# EAGLE board happy plant (EAGLE 9.7.0)

Size 199.61 x 152.56 mm. Coordinates in mm from the lower left corner, seen from the top.
Outline: 0,0 199.61,0 199.61,152.56 0,152.56 0,0
Copper layers (1*16): Top 0.035mm / dielectric 1.5mm / Bottom 0.035mm
Design rules "default": minimum track width 6mil, minimum drill 0.35mm, track to track 6mil, track to pad 6mil, pad to pad 6mil, via to via 6mil, smd to smd 6mil, copper to edge 40mil, drill to drill 6mil, minimum pad ring 10mil, minimum via ring 8mil, stop-mask expansion 4mil, vias tented up to drill 0mil, thermal gap 10mil

## Footprints (pad centres in the part's own frame; a part is rotated, then mirrored left to right if it is on the bottom)
BATTERY-GENERIC = drill 1.118 pad 3.15 octagon: + 2.54,0; - -2.54,0
LEDRD254W60D565H860B_W = drill 0.981 pad 1.581: 1 -1.27,0; 2 1.27,0
RESAD1016W63L850D250B = drill 0.83 pad 1.43: 1 -5.08,0; 2 5.08,0
HA-06-SM065 = drill 1 pad 1.676: 1 -2.54,-2.54; 2 0,2.54; 3 2.54,-2.54
SG90 = drill 1.016 long: 1 -2.54,0; 2 0,0; 3 2.54,0
TO220BV = drill 1.016 long: D 0,-2.54; G -2.54,-2.54; S 2.54,-2.54
ARDUINO-UNO-R3-SHIELD = drill 1.016 pad 1.88: 3.3V 24.13,-2.54; 5V 24.13,0; A0 24.13,12.7; A1 24.13,15.24; A2 24.13,17.78; A3 24.13,20.32; A4 24.13,22.86; A5 24.13,25.4; AREF -24.13,-13.97; D2 -24.13,20.32; D3 -24.13,17.78; D4 -24.13,15.24; D5 -24.13,12.7; D6 -24.13,10.16; D7 -24.13,7.62; D8 -24.13,3.81; D9 -24.13,1.27; D10 -24.13,-1.27; D11 -24.13,-3.81; D12 -24.13,-6.35; D13 -24.13,-8.89; GND@0 24.13,2.54; GND@1 24.13,5.08; GND@2 -24.13,-11.43; IOREF 24.13,-7.62; NC 24.13,-10.16; RES 24.13,-5.08; RX -24.13,25.4; SCL -24.13,-19.05; SDA -24.13,-16.51; TX -24.13,22.86; VIN 24.13,7.62
7SEG-X4-I2C = drill 1.016 long: P$1 -3.81,0; P$2 -1.27,0; P$3 1.27,0; P$4 3.81,0

## Placement (x,y rotation side)
BAT1  9V  [BATTERY-GENERIC]  190.08,133.04 90 top
BAT2  9V  [BATTERY-GENERIC]  191.36,90.53 90 top
D4  WHITE  [LEDRD254W60D565H860B_W]  57.57,134.15 270 top
D5  WHITE  [LEDRD254W60D565H860B_W]  67.73,134.15 270 top
D6  WHITE  [LEDRD254W60D565H860B_W]  77.89,134.15 270 top
R1  4k  [RESAD1016W63L850D250B]  44.87,140.5 90 top
R2  1k  [RESAD1016W63L850D250B]  77.89,127.8 90 top
R3  1k  [RESAD1016W63L850D250B]  67.73,127.8 90 top
R4  1k  [RESAD1016W63L850D250B]  57.57,127.8 90 top
RPOTNUM3  250k  [HA-06-SM065]  153.95,15.66 0 top
RPOTNUM13  250k  [HA-06-SM065]  184.57,15.22 0 top
RPOTNUM24  250k  [HA-06-SM065]  169.34,15.2 0 top
RPOTNUM44  10k  [HA-06-SM065]  138.76,15.99 0 top
SERVO1  SERVOSG90  [SG90]  44.87,145.58 180 top
T3  NMOSFET  [TO220BV]  77.89,112.56 0 top
T4  NMOSFET  [TO220BV]  67.73,112.56 0 top
T5  NMOSFET  [TO220BV]  57.57,112.56 0 top
U1  ARDUINO-UNO-R3-SHIELD  [ARDUINO-UNO-R3-SHIELD]  47.88,29.84 270 top
U2  RED  [7SEG-X4-I2C]  120.6,62.25 0 top

## Library data of the parts
BAT1 BAT2 R1-R4 RPOTNUM3 RPOTNUM13 RPOTNUM24 RPOTNUM44 SERVO1 U1 U2 = Tinkercad
D4-D6 = Tinkercad; CATEGORY: Opto-Electronic; SUB-CATEGORY: LED; VALUE: LED_WHITE
T3-T5 = Tinkercad; CATEGORY: Transistor; SUB-CATEGORY: MOSFET; TYPE: N-Channel

## Nets
BAT1+: BAT1.+ D4.1 D5.1 D6.1 R1.1
BAT1-: BAT1.- BAT2.+
BAT2-: BAT2.- RPOTNUM3.1 RPOTNUM13.1 RPOTNUM24.1 RPOTNUM44.1 SERVO1.1 T3.S T4.S T5.S U1.GND@0 U1.GND@1 U1.GND@2 U2.P$2
D4_C: D4.2 R4.2
D5_C: D5.2 R3.2
D6_C: D6.2 R2.2
SERVO1_PWR: R1.2 SERVO1.2
T3_D: R2.1 T3.D
T4_D: R3.1 T4.D
T5_D: R4.1 T5.D
U1_5V: RPOTNUM3.3 RPOTNUM13.3 RPOTNUM24.3 RPOTNUM44.3 U1.5V U2.P$1
U1_A0: RPOTNUM44.2 U1.A0
U1_A1: RPOTNUM13.2 U1.A1
U1_A2: RPOTNUM24.2 U1.A2
U1_A3: RPOTNUM3.2 U1.A3
U1_D3: T3.G U1.D3
U1_D9: T4.G U1.D9
U1_D10: T5.G U1.D10
U1_D11: SERVO1.3 U1.D11
U1_SCL: U1.SCL U2.P$4
U1_SDA: U1.SDA U2.P$3

## Tracks (layer width: path | path; a pad name or v marks a point on that pad's centre or on a via)
BAT1+  (4 unrouted)
BAT1-  (1 unrouted)
BAT2-  (12 unrouted)
D4_C  (1 unrouted)
D5_C  (1 unrouted)
D6_C  (1 unrouted)
SERVO1_PWR  (1 unrouted)
T3_D  (1 unrouted)
T4_D  (1 unrouted)
T5_D  (1 unrouted)
U1_5V  (5 unrouted)
U1_A0  (1 unrouted)
U1_A1  (1 unrouted)
U1_A2  (1 unrouted)
U1_A3  (1 unrouted)
U1_D3  (1 unrouted)
U1_D9  (1 unrouted)
U1_D10  (1 unrouted)
U1_D11  (1 unrouted)
U1_SCL  (1 unrouted)
U1_SDA  (1 unrouted)